# Altium PCB 铝基板.PcbDoc
Units mil, origin at the board's own origin, x right, y up, seen from the top; angles counter-clockwise.
Board outline 354.33 x 771.65 mil, 2 copper layers (Top Layer, Bottom Layer); 4 components, 2 nets, 12 pads, 0 vias.
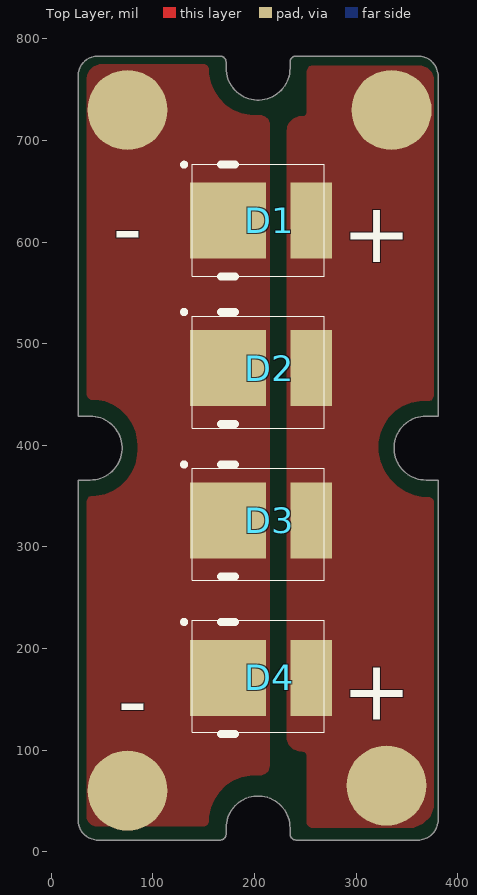
[diagram p0: Top Layer view]
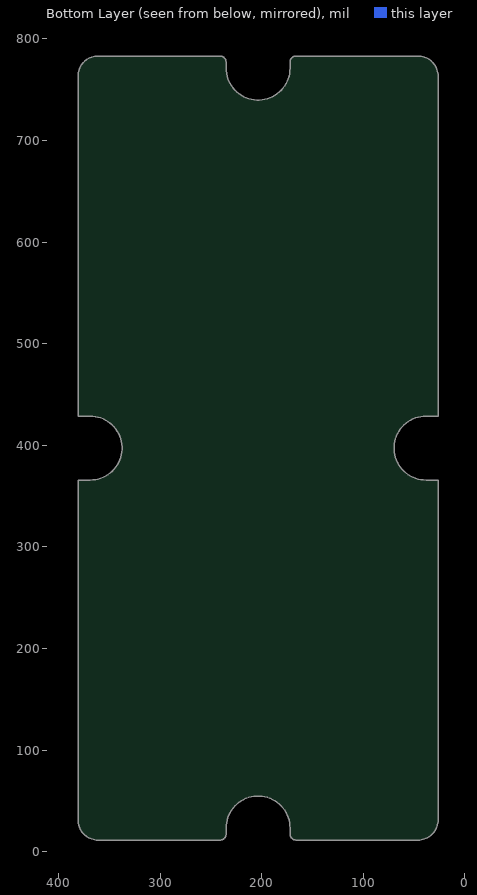
[diagram p1: Bottom Layer view, seen from below]

## Layer stack, top to bottom
Top Solder: solder mask 0.4, Solder Resist, Dk 3.5
Top Layer: signal copper 1.4
Dielectric 1: dielectric 12.6, FR-4, Dk 4.8
Bottom Layer: signal copper 1.4
Bottom Solder: solder mask 0.4, Solder Resist, Dk 3.5

## Board outline
26.42,31.07 ccw(c46.1,31.07) 46.1,11.39 166.18,11.39 ccw(c166.18,17.29) 172.08,17.29 172.08,23.2 cw(c203.58,23.2) 235.08,23.2 235.08,17.29 ccw(c240.98,17.29) 240.98,11.39 361.06,11.39 ccw(c361.06,31.07) 380.75,31.07 380.75,365.72 368.94,365.72 cw(c368.94,397.22) 368.94,428.71 380.75,428.71 380.75,763.36 ccw(c361.06,763.36) 361.06,783.04 240.98,783.04 ccw(c240.98,777.14) 235.08,777.14 235.08,771.23 cw(c203.58,771.23) 172.08,771.23 172.08,777.14 ccw(c166.18,777.14) 166.18,783.04 46.1,783.04 ccw(c46.1,763.36) 26.42,763.36 26.42,428.71 38.23,428.71 cw(c38.23,397.22) 38.23,365.72 26.42,365.72

## Design rules (kind name [scope] priority, off if disabled: settings)
Clearance [All] p1: gap=10 ignorepadtopadclearanceinfootprint=FALSE except(0: Arc-Hole Track-Hole SMDPad-Hole THPad-Hole Via-Hole Fill-Hole Poly-Hole Region-Hole Text-Hole)
PlaneConnect [All] p1: planeconnectstyle=Direct reliefexpansion=20 reliefentries=4 reliefconductorwidth=10 reliefairgap=10
PolygonConnect [All] p1: connectstyle=Direct reliefconductorwidth=10 reliefentries=4 polygonreliefangle="90 Angle" airgapwidth=10
RoutingVias [All] p1: holewidth=28 width=50 viastyle="Through Hole" minholewidth=28 minwidth=50 maxholewidth=28 maxwidth=50
SolderMaskExpansion [All] p1: expansion=4
Width [All] p1: maxlimit=10 minlimit=10 preferedwidth=10
29 further rules are at their usual default settings.

## Components (designator, comment, footprint, x,y, rotation, side; value= is the part's Value field where it differs from the comment)
D1 "LED3" 3528-L 174.11,621 r0 top
D2 "LED3" 3528-L 174.11,476 r0 top
D3 "LED3" 3528-L 174.11,326 r0 top
D4 "LED3" 3528-L 174.11,171 r0 top

## Footprints (in the part's own frame and the unit in brackets; to place one, negate y for a bottom-side part, rotate by r counter-clockwise, add the part's x,y. Pads: shape width x height; smd on the part's side, far side on the other; paste and mask are expansions set on the pad)
3528-L [mm]
  rect 1.03x1.9 smd: 1(2.08,0)
  rect 1.9x1.9 smd: 2(0,0)
  silkscreen extent -1.15,-1.4 0.17,1.45, body extent -0.8,-1.4 2.4,1.4, height 1.8

## Part data
D1 D2 D3 D4: "Typical BLUE SiC LED", DatasheetVersion=16-Apr-2002, LatestRevisionDate=17-Dec-2003, LatestRevisionNote="PCB Footprint replaced.", PackageDescription="SM LED; 2 C-Bend Leads; Body 3.5 x 2.8 x 1.9 mm, inc leads (LxWxH typ)", PackageReference=3.5X2.8X1.9, PackageVersion=16-Apr-2002, Published=8-Jun-2000, Publisher="Altium Limited"

## Free pads (board coordinates)
  round 78.74 smd: 1(75,60) 1(75,730) 1(330,65) 1(335,730)

## Nets (pads, with @x,y where several pads share a name; then routed paths per layer and width w, separated by ;. In a path a pad name is that pad's centre, name@x,y a point inside that pad or via, vN(x,y) a via of type N, cw(c..) or ccw(c..) an arc to the next point about the centre after c; other vN are vias at no path point)
GND: D1.2 D2.2 D3.2 D4.2 pad.1@75,60 pad.1@75,730
VCC: D1.1 D2.1 D3.1 D4.1 pad.1@330,65 pad.1@335,730

## Polygon pours and split planes (outlines as drawn)
VCC on Top Layer "Mechanical 1-No Net" (solid, remove dead copper, pour order 0): 351.72,23.65 ccw(c351.72,48.65) 376.72,48.65 376.72,343.65 ccw(c371.72,343.65) 371.72,348.65 cw(c371.72,398.65) 321.72,398.65 cw(c366.72,398.65) 366.72,443.65 371.72,443.65 ccw(c371.72,448.65) 376.72,448.65 376.72,758.65 ccw(c361.72,758.65) 361.72,773.65 256.72,773.65 ccw(c256.72,768.65) 251.72,768.65 251.72,728.65 cw(c246.72,728.65) 246.72,723.65 ccw(c246.72,708.65) 231.72,708.65 231.72,113.65 ccw(c246.72,113.65) 246.72,98.65 cw(c246.72,93.65) 251.72,93.65 251.72,28.65 ccw(c256.72,28.65) 256.72,23.65
GND on Top Layer "Mechanical 1-No Net" (solid, remove dead copper, pour order 2): 45,25 150,25 ccw(c150,30) 155,30 cw(c200,30) 200,75 205,75 ccw(c205,85) 215,85 215,715 ccw(c205,715) 205,725 200,725 cw(c200,770) 155,770 ccw(c150,770) 150,775 50,775 ccw(c50,760) 35,760 35,450 ccw(c40,450) 40,445 cw(c40,400) 85,400 85,395 cw(c40,395) 40,350 ccw(c40,345) 35,345 35,35 ccw(c45,35)

## Silkscreen, mask and mechanical layers (free items; w line width, h text height)
Top Overlay:
  lines w0.5: 138.62,117.69 268.54,117.69 268.54,227.92 138.62,227.92 138.62,117.69 ; 138.62,267.29 268.54,267.29 268.54,377.53 138.62,377.53 138.62,267.29 ; 138.62,416.9 268.54,416.9 268.54,527.14 138.62,527.14 138.62,416.9 ; 138.62,566.51 268.54,566.51 268.54,676.74 138.62,676.74 138.62,566.51
  text "-" at 90,585 h60
  text "+" at 355,580 h60
  text "+" at 355,130 h60
  text "-" at 95,120 h60
Top Solder:
  text "RM" at 360,480 h39.37 r90
  text "RM" at 50,310 h39.37 r270
Mechanical 1:
  the board outline again, w0.5
Mechanical 15:
  lines w0.5: 26.42,339.35 ccw(c38.23,397.22) 26.42,455.08 ; 145.72,11.39 cw(c203.58,23.2) 261.44,11.39 ; 145.72,783.04 ccw(c203.58,771.23) 261.44,783.04 ; 380.75,339.35 cw(c368.94,397.22) 380.75,455.08